# Altium PCB PX4FMUv1.6.PcbDoc (part 2 of 2)
Units mil, origin at the board's own origin, x right, y up, seen from the top; angles counter-clockwise.
Board outline 1968.5 x 1417.32 mil, 4 copper layers (Top, Route2, Route15, Bottom), stack 57.482 mil thick; 118 components, 107 nets, 504 pads, 254 vias.
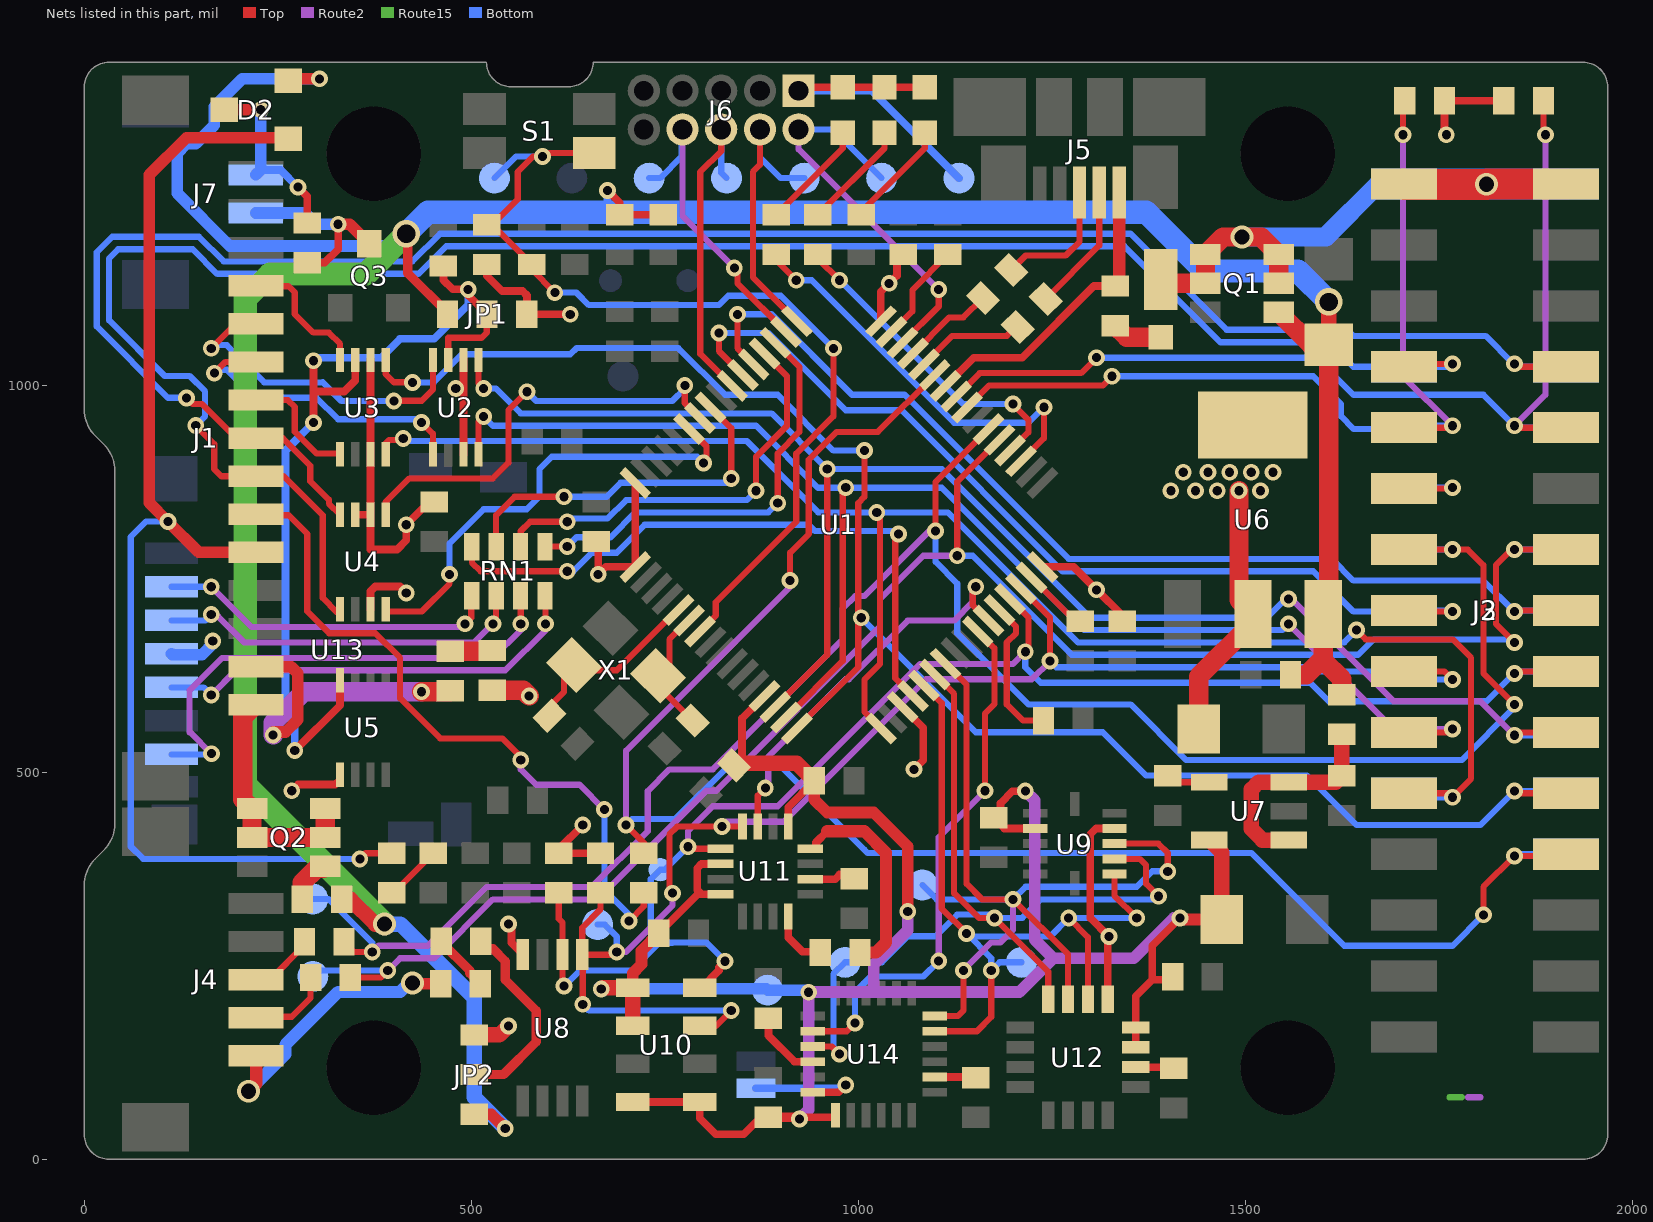
[diagram p4: the nets of this part, all layers, seen from the top]

## Via types
v1: diameter 21.65/21.65/21.65/21.65 (per signal layer), hole 11.81, Top to Bottom, 242 vias
v2: diameter 29.54/29.54/29.54/29.54 (per signal layer), hole 19.69, Top to Bottom, 8 vias
v3: diameter 35.43/35.43/35.43/35.43 (per signal layer), hole 23.62, Top to Bottom, 4 vias

## Nets (pads, with @x,y where several pads share a name; then routed paths per layer and width w, separated by ;. In a path a pad name is that pad's centre, name@x,y a point inside that pad or via, vN(x,y) a via of type N, cw(c..) or ccw(c..) an arc to the next point about the centre after c; other vN are vias at no path point) (continued)
I2C2_SCL: I2C2_SCL.P$1 J2.17 J3.17 R20.1 U1.29 U8.6 U10.8 U11.1 | length 2082.7
  Top w8: R20.1@616,341.09 R20.1@613,344.1 613,310.69 617.8,305.89 U8.6@617.8,264.18 617.8,225.89 v1(620,223.69) ; v1(780,403.69) 782.47,401.21 U11.1@821.93,401.22 ; U1.29@1196.32,723.63 1220,699.95 1220,659.68 v1(1216,655.68) ; v1(1848,627.68) 1850.55,630.24 J3.17@1914.53,630.24
  Top w10: U10.8@795.31,221.51 797.82,221.5 820,243.69 820,247.69 v1(828,255.69)
  Route2 w8: v1(780,403.69) 780,424 812,456 896,456 1080,640 1199.37,640 1199.69,639.68 1216,656 v1(1216,655.68)
  Bottom w8: v1(620,223.69) 640,243.69 707.18,243.69 743.18,279.69 ; 760,279.69 743.18,279.69 ; v1(780,403.69) 750.33,374.02 I2C2_SCL.P$1@744.22,374.02 732,361.8 732,290.87 743.18,279.69 ; v1(828,255.69) 803.68,280 743.5,280 743.18,279.69 ; v1(1216,655.68) 1216,635.68 1236,615.68 1584,615.68 1608,591.68 1812,591.68 v1(1848,627.68) 1850.55,630.24 J2.17@1914.53,630.24
I2C2_SDA: I2C2_SDA.P$1 J2.18 J3.18 R19.1 U1.30 U8.5 U10.7 U11.16 | length 2003.5
  Top w8: v1(644,200) 644,263.56 U8.5@643.39,264.18 ; R19.1@667,344.1 667,322.69 643.39,299.07 U8.5@643.39,264.18 ; v1(688,267.69) 684.49,264.17 U8.5@643.39,264.18 ; v1(760,343.69) 756,347.69 756,419.69 766.07,429.76 v1(824,429.76) U11.16@850.47,429.76 ; U10.7@795.31,172.3 816.29,172.29 v1(836,192) ; U1.30@1210.24,737.56 1248,699.8 v1(1248,643.68) ; J3.18@1705.47,630.24 1757.45,630.24 v1(1768,619.68)
  Route2 w8: v1(688,267.69) 700,267.69 760,327.69 v1(760,343.69) ; v1(824,429.76) 830.24,436 904,436 1088,620 1224.32,620 v1(1248,643.68)
  Bottom w8: v1(644,200) 652,192 v1(836,192) ; I2C2_SDA.P$1@663.39,303.15 672.54,303.15 688,287.69 v1(688,267.69) ; v1(1248,643.68) 1256,635.68 1592,635.68 1597.45,630.24 J2.18@1705.47,630.24 1716.02,619.68 v1(1768,619.68)
I2C3_SCL: J2.9 J3.9 R9.1 U1.41 | length 1351.3
  Top w8: U1.41@1126.72,985.32 1157.08,1015.69 1288,1015.69 v1(1308,1035.69) ; v1(1848,947.69) 1850.49,945.2 J3.9@1914.53,945.2 ; R9.1@1885.59,1367.69 1885.59,1326.09 v1(1888,1323.69)
  Route2 w8: v1(1848,947.69) 1888,987.69 v1(1888,1323.69)
  Bottom w8: v1(1308,1035.69) 1592,1035.69 1640,987.69 1808,987.69 v1(1848,947.69) 1850.49,945.2 J2.9@1914.53,945.2
I2C3_SDA: J2.10 J3.10 R7.1 U1.40 | length 1195.7
  Top w8: U1.40@1140.64,971.4 1168.92,999.69 1316,999.69 v1(1328,1011.69) ; v1(1704,1323.69) 1704,1367.69 R7.1@1706.41,1367.69 ; J3.10@1705.47,945.2 1765.51,945.2 v1(1768,947.69)
  Route2 w8: v1(1704,1323.69) 1704,1011.69 v1(1768,947.69)
  Bottom w8: v1(1328,1011.69) 1588,1011.69 1624,975.69 1624,959.69 1640,943.69 1703.96,943.69 J2.10@1705.47,945.2 1707.96,947.69 v1(1768,947.69)
JTCK-SWCLK: J6.4 JTCK-SWCLK.P$1 U1.49 | length 379.7
  Top w8: J6.4@873,1330.69 873,1284.69 864,1275.69 864,1139.47 U1.49@920.72,1082.76
  Bottom w8: J6.4@873,1330.69 873,1294.69 900.03,1267.65 JTCK-SWCLK.P$1@930.32,1267.65
JTDI: J6.8 JTDI.P$1 U1.50 | length 406.4
  Top w8: v1(840,1151.69) 844,1147.69 844,1131.63 U1.50@906.79,1068.84
  Route2 w8: J6.8@773,1330.69 773,1218.69 v1(840,1151.69)
  Bottom w8: JTDI.P$1@729.92,1267.65 743.97,1267.65 772,1295.69 772,1329.69 J6.8@773,1330.69
JTDO: J6.6 JTDO.P$1 U1.55 | length 425.6
  Top w8: J6.6@823,1330.69 823,1302.69 796,1275.69 796,1040.44 U1.55@837.2,999.24
  Bottom w8: J6.6@823,1330.69 823,1274.57 JTDO.P$1@829.92,1267.65
JTMS-SWDIO: J6.2 JTMS-SWDIO.P$1 U1.46 | length 503.6
  Top w8: U1.46@1057.12,1054.92 1104,1101.8 v1(1104,1123.69)
  Route2 w8: J6.2@923,1330.69 923,1304.69 v1(1104,1123.69)
  Bottom w8: J6.2@923,1330.69 967.28,1330.69 JTMS-SWDIO.P$1@1030.32,1267.65
LED_AMBER: R14.1 U1.35 | length 530.9
  Top w8: R14.1@894,1169.1 894,1161.69 v1(920,1135.69) ; U1.35@1210.24,901.8 1240,931.57 v1(1240,971.69)
  Bottom w8: v1(920,1135.69) 940,1135.69 1124,951.69 1220,951.69 v1(1240,971.69)
LED_BLUE: R15.1 U1.36 | length 413.3
  Top w8: R15.1@948,1169.1 948,1163.69 v1(976,1135.69) ; U1.36@1196.32,915.73 1220,939.41 1220,955.69 v1(1200,975.69)
  Bottom w8: v1(976,1135.69) 1136,975.69 v1(1200,975.69)
MAG_DRDY: U1.27 U11.15 | length 518.5
  Top w8: U11.15@870.16,429.76 870.16,469.84 v1(880,479.69) ; v1(1152,739.68) 1152,735.68 1148,731.68 1148,715.68 1167.89,695.8 U1.27@1168.48,695.79
  Route2 w8: v1(880,479.69) 883.69,483.37 883.69,519.68 984,620 988,620 1064,696 1124,696 1148,720 1148,735.68 v1(1152,739.68)
MPU_CS: U1.26 U14.8 | length 688.4
  Top w8: U14.8@941.26,165.22 985.21,165.21 v1(996,176) ; U1.26@1154.56,681.88 1176,660.44 1176,588 1164,576 v1(1164,476)
  Route2 w8: v1(1104,256) 1104,416 v1(1164,476)
  Bottom w8: v1(996,176) 996,216 1016,236 1084,236 v1(1104,256)
N$1: C4.2 U1.6 X1.1 | length 165.2
  Top w8: U1.6@781.52,695.79 780.11,695.8 756,671.68 756,639.44 X1.1@741.28,624.72 741.28,611.59 C4.2@786.16,566.7
N$2: C3.1 U1.5 X1.3 | length 249
  Top w8: C3.1@600.98,572.85 600.98,584.66 620,603.68 620,625.93 X1.3@632.72,638.64 639.67,631.68 688,631.68 766.04,709.72 U1.5@767.6,709.72
N$3: J1.2 L2.2 | length 422.2
  Top w15: J1.2@221.92,636.41 267.59,636.41 276,628 276,568 260,552 244,552 v1(244,548)
  Top w25: v1(435.69,604) 471.91,604 L2.2@473,605.09
  Route2 w25: v1(244,548) 244,564 284,604 v1(435.69,604)
N$4: D2.3 J7.1 R22.2 | length 242.7
  Top w10: v1(276,1256) 288,1244 R22.2@288,1209.59
  Top w15: D2.3@180.69,1356 v1(228,1356)
  Bottom w10: J7.1@228,1278.21 253.79,1278.21 v1(276,1256)
  Bottom w15: J7.1@221.61,1271.82 228,1278.21 v1(228,1356)
N$5: F2.2 L3.1 | length 75.5
  Top w12: F2.2@461.03,281.29 461.03,280.65 498,243.69 498,240.28 L3.1@511.59,226.69
N$8: J4.2 L5.2 | length 107.4
  Top w8: J4.2@221.92,182.79 223.13,184 268,184 292.41,208.41 L5.2@292.41,234.69
N$9: C16.1 U7.4 | length 57.2
  Top w8: C16.1@1400,495.28 1408.19,487.09 U7.4@1453.81,487.09
N$10: C24.1 U11.8 | length 76.8
  Top w10: U11.8@909.53,313.62 909.53,286.47 928,268 950.09,268 C24.1@951.1,267
N$11: J4.3 L4.2 | length 85.2
  Top w8: J4.3@221.92,232 225.92,236 244,236 280.41,272.41 280.41,276.69 L4.2@284.41,280.69
N$12: J1.11 U2.8 | length 434
  Top w8: v1(164,1047.69) 195.64,1079.32 J1.11@221.92,1079.33 ; v1(400,979.69) 400.32,980 436,980 450.47,994.47 U2.8@450.47,1032.71
  Bottom w8: v1(164,1047.69) 168.32,1052 184,1052 232.32,1003.69 308,1003.69 308,1004 332.32,979.69 v1(400,979.69)
N$13: J1.10 U2.1 | length 405.4
  Top w8: v1(168,1015.69) 182.43,1030.11 J1.10@221.92,1030.12 ; v1(435.75,951.87) 436.13,951.87 450.47,937.53 U2.1@450.47,910.67
  Bottom w8: v1(168,1015.69) 172.32,1020 184,1020 220,984 300,984 328,956 ; 328.13,955.87 328,956 ; v1(435.75,951.87) 431.62,956 328,956
N$14: L1.2 Q2.4 | length 60
  Top w25: L1.2@281.41,335.69 281.41,357.09 300,375.69 308.65,375.69 Q2.4@311.24,378.29
N$15: J1.12 U3.8 | length 181.3
  Top w8: J1.12@221.92,1128.54 222.46,1128 264,1128 272,1120 272,1092 296,1068 316,1068 330.47,1053.53 U3.8@330.47,1032.71 U3.8@330.47,1037.21
N$16: J1.9 U3.1 | length 156.4
  Top w8: J1.9@221.92,980.9 263.1,980.9 272,972 272,940 300,912 329.13,912 U3.1@330.47,910.67 U3.1@330.47,910.67
N$17: C24.2 U11.12 | length 278.3
  Top w10: U11.12@938.07,401.22 945.53,401.21 945.53,409.21 960,423.69
  Top w16: 960,423.69 1008,423.69 1036,395.69 1036,280 1023,267 C24.2@1002.28,267
N$18: F2.1 JP2.2 | length 260.5
  Top w12: JP2.2@504,109.28 541.59,109.28 584,151.69 584,191.69 544,231.69 544,255.69 528,271.69 521.82,271.69 F2.1@512.21,281.29
N$20: J2.12 J3.12 | length 126.1
  Top w8: J3.12@1705.47,866.46 1766.77,866.46 v1(1768,867.69)
  Bottom w8: J2.12@1705.47,866.46 1706.7,867.69 v1(1768,867.69)
N$21: RN1.5 U13.P$2 | length 442.8
  Top w8: v1(492,691.68) 500,699.68 500,723.43 500.76,724.19 RN1.5@500.76,728.18
  Route2 w8: v1(164,739.68) 216,687.68 488,687.68 v1(492,691.68)
  Bottom w8: U13.P$2@112.63,739.53 112.79,739.68 v1(164,739.68)
N$23: D1.ANODE L8.1 | length 65.2
  Top w25: L8.1@1332,1077.1 1347,1062.09 D1.ANODE@1391,1062.1
N$24: J4.1 L3.2 | length 364
  Top w15: v2(424,227.69) 425,226.69 L3.2@460.41,226.69
  Top w16: v2(212,87.69) 221.92,97.61 J4.1@221.92,133.57
  Bottom w16: v2(212,87.69) 260,135.69 260,148 328,216 408,216 419.69,227.69 v2(424,227.69)
N$25: J7.2 Q3.3 R22.1 | length 242.1
  Top w10: R22.1@288,1158.41 310.41,1158.41 328,1176 v1(328,1208)
  Top w15: v1(328,1208) 342.99,1208 Q3.3@368,1183
  Bottom w15: J7.2@221.61,1222.61 285.39,1222.61 300,1208 v1(328,1208)
N$26: RN1.6 U13.P$3 | length 481.6
  Top w8: v1(528,691.68) 532,695.68 532,727.94 RN1.6@532.25,728.18
  Route2 w8: v1(164,703.68) 166.9,700.79 173.23,700.79 206.33,667.68 504,667.68 v1(528,691.68)
  Bottom w8: U13.P$3@112.63,696.23 156.54,696.22 v1(164,703.68)
N$27: F1.2 L2.1 | length 54.6
  Top w25: L2.1@473,656.27 526.28,656.28 F1.2@527.24,657.24
N$28: LED3.C R15.2 | length 141.5
  Top w8: R15.2@948,1220.28 1034,1306.28 LED3.C@1034,1326.16
N$29: LED1.C R13.2 | length 139.8
  Top w8: R13.2@1004,1220.28 1004,1224.28 1086,1306.28 LED1.C@1086,1326.16
N$30: LED2.C R14.2 | length 141.5
  Top w8: R14.2@894,1220.28 980,1306.28 LED2.C@980,1326.16
N$31: RN1.7 U13.P$7 | length 650.8
  Top w8: RN1.7@563.75,728.18 564,727.94 v1(564,691.68)
  Route2 w8: v1(164.32,524) 136.63,551.68 136,551.68 136,605.68 178,647.68 528,647.68 564,683.68 v1(564,691.68)
  Bottom w8: U13.P$7@112.63,523 163.31,522.99 v1(164.32,524)
N$32: RN1.8 U13.P$5 | length 567.1
  Top w8: RN1.8@595.24,728.18 596,727.43 v1(596,691.68)
  Route2 w8: v1(164,599.68) 196,631.68 544,631.68 596,683.68 v1(596,691.68)
  Bottom w8: U13.P$5@112.63,609.61 154.08,609.61 v1(164,599.68)
N$34: C25.1 U12.14 | length 49.9
  Top w10: U12.14@1358.8,118.89 1406.39,118.89 C25.1@1408,117.28
N$35: L10.1 R11.2 | length 75.2
  Top w8: L10.1@397,344.1 399.82,344.09 R11.2@451,395.28
N$36: C23.1 U11.10 | length 61.6
  Top w10: U11.10@938.07,361.85 970.16,361.84 976,367.69 989.59,367.69 C23.1@995,362.28
N$40: C20.1 U14.20 | length 55.4
  Top w10: U14.20@1098.74,106.16 1152.88,106.16 C20.1@1152,105.28
N$41: J1.1 Q2.1 Q2.2 Q2.5 Q2.6 | length 316
  Top w25: J1.1@221.92,587.2 221.12,587.2 204.72,570.8 204.72,465.12 Q2.1@216.76,453.09 Q2.2@216.76,415.69 Q2.5@311.24,415.69 Q2.6@311.24,453.09
N$42: C26.1 U14.10 | length 93.7
  Top w10: C26.1@884,182.1 884,159.69 917.84,125.84 U14.10@941.26,125.85
N$44: JP6.2 U14.12 | length 164.2
  Top w10: U14.12@941.26,86.48 974.79,86.47 v1(984,95.69)
  Bottom w10: JP6.2@868,91.69 980,91.69 v1(984,95.69)
N$100: C14.1 L11.2 U7.1 U7.3 | length 283.3
  Top w10: C14.1@1616.81,487.09 C14.1@1625,495.28
  Top w20: U7.1@1556.19,412.29 1522.4,412.28 1508,426.69 1508,477.69 1517.4,487.09 U7.3@1556.19,487.09 C14.1@1616.81,487.09 ; C14.1@1625,495.28 L11.2@1625,549.09
OTG_DM: J5.D- R6.1 | length 166.4
  Top w8: R6.1@1242.35,1111.41 1311.59,1180.65 J5.D-@1311.59,1249.13
OTG_DP: J5.D+ R8.1 | length 167.1
  Top w8: R8.1@1197.62,1148.82 1216.48,1167.69 1268,1167.69 1286,1185.69 J5.D+@1286,1249.13
OTG_FS_DM: R6.2 U1.44 | length 141.1
  Top w8: U1.44@1084.96,1027.08 1121.56,1063.69 1192,1063.69 1203.53,1075.22 R6.2@1206.17,1075.23
OTG_FS_DP: R8.2 U1.45 | length 120.1
  Top w8: U1.45@1071.05,1041 1117.73,1087.69 1136,1087.69 1160.95,1112.63 R8.2@1161.44,1112.64
PB2-BOOT1: R5.1 U1.28 | length 192.1
  Top w8: U1.28@1182.4,709.72 1204,688.12 1204,679.68 1192,667.68 1192,587.68 1213,566.68 R5.1@1239.41,566.68
POLY1:  | length 16
  Route15 w8: 1764,80 1780,80
POLY2:  | length 16
  Route2 w8: 1788,80 1804,80
PPM_INPUT: J2.23 J3.23 R10.1 U1.43 | length 2305.3
  Top w8: v1(700,431.69) 724,407.69 724,396.28 R10.1@723,395.28 ; v1(912,747.68) 912,783.68 936,807.68 936,903.69 972,939.69 1025.41,939.69 U1.43@1098.89,1013.16 ; v1(1808,315.69) 1808,351.69 v1(1848,391.69) 1912.2,391.69 J3.23@1914.53,394.02
  Route2 w8: v1(700,431.69) 700,527.68 912,739.68 v1(912,747.68)
  Bottom w8: v1(700,431.69) 708,439.69 763.68,439.69 832,508 900,508 1008,400 1007.69,400 1012,395.69 1508,395.69 1628,275.69 1768,275.69 v1(1808,315.69) ; v1(1848,391.69) 1850.33,394.02 J2.23@1914.53,394.02
PPM_INPUT_CON: J1.6 R10.2 | length 908.1
  Top w8: J1.6@221.92,833.26 223.18,832 264,832 288,808 288,708 316.32,679.68 376,679.68 408,647.68 408,595.68 460,543.68 540,543.68 564,519.68 v1(564,515.68) ; v1(704,307.69) 723,326.69 R10.2@723,344.1
  Route2 w8: v1(564,515.68) 564,503.69 584,483.69 640,483.69 v1(672,451.69)
  Bottom w8: v1(672,451.69) 672,351.69 672,348 704,316 v1(704,307.69)
RESET: !RESET.P$1 C17.2 R16.1 S1.A1 U1.7 | length 1230.6
  Top w8: R16.1@520,1207.28 R16.1@526.82,1207.28 ; v1(608,1119.69) 578,1149.69 C17.2@578,1156.1 R16.1@526.82,1207.28 ; S1.A1@658.41,1299.69 658.87,1300.14 596.46,1300.14 v1(592,1295.69) 580,1295.69 560,1275.69 560,1240.46 R16.1@526.82,1207.28 ; U1.7@795.44,681.88 816,702.44 816,719.68 920,823.68 920,911.69 968,959.69 v1(968,1047.69)
  Bottom w8: !RESET.P$1@529.92,1267.65 557.95,1295.69 v1(592,1295.69) ; v1(608,1119.69) 636,1119.69 652,1103.69 820,1103.69 832,1115.69 900,1115.69 v1(968,1047.69)
SPI1_MISO: SPI1_MISO.P$1 U1.22 U9.8 U12.4 U14.9 | length 1194.5
  Top w8: U14.9@941.26,145.53 966.16,145.53 v1(976,135.69) ; U1.22@1098.89,626.2 1124,601.09 1124,343.69 1156,311.69 v1(1176,311.69) 1245.61,242.07 U12.4@1245.61,206.49 ; U9.8@1331.18,388 1363.69,388 1372,379.69 1372,355.69 v1(1388,339.69)
  Bottom w8: v1(976,135.69) 976,136 968,144 968,239.34 SPI1_MISO.P$1@982.99,254.33 1030.65,254.33 1030.65,254.65 1064,288 1100,288 1128,316 1168,316 1172,312 1175.69,312 v1(1176,311.69) ; v1@1176,312 v1(1176,311.69) ; v1(1388,339.69) 1384,335.69 1236,335.69 1212,311.69 v1(1176,311.69)
SPI1_MOSI: SPI1_MOSI.P$1 U1.23 U9.9 U12.3 U14.24 | length 1177.8
  Top w8: U14.24@1098.74,184.9 1128.9,184.9 1136,192 v1(1136,243.69) ; U1.23@1112.8,640.12 1140,612.92 1140,355.69 1160,335.69 v1(1200,335.69) 1271.2,264.48 U12.3@1271.2,206.49 ; U9.9@1331.18,407.69 1388,407.69 1400,395.69 v1(1400,371.69)
  Route2 w8: v1(1136,243.69) 1136,244 1172,280 1184,280 1200,296 v1(1200,335.69)
  Bottom w8: SPI1_MOSI.P$1@1082.99,354.33 1101.64,335.69 v1(1200,335.69) 1216.32,352 1360,352 1380,372 1399.69,372 v1(1400,371.69)
SPI1_SCK: SPI1_SCK.P$1 U1.21 U9.7 U12.2 U14.23 | length 1004.9
  Top w8: U1.21@1084.96,612.28 1108,589.24 1108,323.69 v1(1140,291.69) ; U14.23@1098.74,165.22 1153.53,165.21 1172,183.69 v1(1172,243.69) ; v1(1272,311.69) 1296.8,286.89 U12.2@1296.8,206.49 ; U9.7@1331.18,368.32 1331.18,340.5 v1(1360,311.69)
  Bottom w8: v1@1140.32,291.69 v1(1140,291.69) ; SPI1_SCK.P$1@1210.99,254.33 1182.65,254.33 v1(1172,243.69) 1172,259.69 v1(1140,291.69) ; v1(1360,311.69) v1(1272,311.69) 1248,287.69 1144,287.69 v1(1140,291.69)
SPI3_MISO: RN1.2 U1.52 | length 556.3
  Top w8: RN1.2@563.75,791.18 563.75,791.43 RN1.2@564,791.68 ; RN1.2@564,787.43 RN1.2@564,791.68 ; v1(624,823.68) 576,823.68 564,811.68 RN1.2@564,791.68 ; v1(868,863.69) 868,907.69 908,947.69 908,1011.95 U1.52@878.95,1041
  Bottom w8: v1(624,823.68) 628,827.68 676,827.68 700,851.69 856,851.69 v1(868,863.69)
SPI3_MOSI: RN1.3 U1.57 | length 467.4
  Top w8: RN1.3@532.25,791.18 532,791.43 532,832 556,856 v1(620,856) ; U1.57@809.36,971.4 836,944.76 v1(836,879.69)
  Bottom w8: v1(620,856) 674.9,856 692.91,874.02 830.33,874.02 v1(836,879.69)
SPI3_NSS: RN1.4 U1.20 | length 826.5
  Top w8: RN1.4@500.76,791.18 500.76,770.93 512,759.68 v1(624,759.68) ; v1(1052,807.68) 1052,803.68 1048,799.68 1048,621.41 U1.20@1071.05,598.36
  Bottom w8: v1(624,759.68) 632,759.68 656,783.68 688,783.68 724,819.68 936,819.68 944,811.68 1048,811.68 v1(1052,807.68)
SPI3_SCK: RN1.1 U1.51 | length 555.9
  Top w8: RN1.1@595.24,791.18 595.75,791.68 v1(624,791.68) ; U1.51@892.88,1054.92 892.87,1054.81 924,1023.69 924,939.69 896,911.69 v1(896,847.69)
  Bottom w8: v1(624,791.68) 636,803.68 680,803.68 712,835.68 884,835.68 v1(896,847.69)
UART5_RX: J2.16 J3.16 U1.54 | length 1228.7
  Top w8: v1(820,1067.69) 820,1044.28 U1.54@851.11,1013.16 ; J3.16@1705.47,708.98 1706.76,707.68 v1(1768,707.68)
  Bottom w8: v1(820,1067.69) 884,1067.69 984,967.69 1056,967.69 1264,759.68 1588,759.68 1640,707.68 1704.18,707.68 J2.16@1705.47,708.98 1766.71,708.98 v1(1768,707.68)
UART5_TX: J2.15 J3.15 U1.53 | length 1370.5
  Top w8: v1(844,1091.69) 844,1048.12 U1.53@865.04,1027.08 ; v1(1848,707.68) 1849.29,708.98 J3.15@1914.53,708.98
  Bottom w8: v1(844,1091.69) 888,1091.69 992,987.69 1060,987.69 1272,775.68 1612,775.68 1640,747.68 1808,747.68 v1(1848,707.68) 1849.29,708.98 J2.15@1914.53,708.98
USART1_RX: U1.59 U4.4 | length 604.1
  Top w8: U4.4@389.53,710.66 392.5,707.68 436,707.68 472,743.68 v1(472,755.68) ; U1.59@781.52,943.57 804,921.09 804,903.69 v1(800,899.69)
  Bottom w8: v1(472,755.68) 472,795.68 516,839.69 571.68,839.69 588,856 588,891.69 604,907.69 792,907.69 v1(800,899.69)
USART1_RX_EXT: J1.7 J2.8 J3.8 U4.1 | length 2559.9
  Top w8: v1(144,948) 168,924 168,891.69 177.21,882.47 J1.7@221.92,882.48 257.53,882.47 308,832 308,725.13 326.47,706.66 U4.1@330.47,710.66 ; J3.8@1705.47,1023.94 1709.22,1027.69 v1(1768,1027.69)
  Bottom w8: v1(144,948) 156,960 156,992 136,1012 104,1012 32,1084 32,1164 43.69,1175.69 140,1175.69 172,1143.69 172.32,1144 432,1144 467.69,1179.69 1344,1179.69 1468,1055.69 1608,1055.69 1639.75,1023.94 J2.8@1705.47,1023.94 1764.25,1023.94 v1(1768,1027.69)
USART1_TX: U1.58 U4.5 | length 567.7
  Top w8: U4.5@389.53,832.7 389.53,849.21 420,879.69 528,879.69 548,899.69 548,967.69 v1(572,991.69) ; v1(776,999.69) 776,976.92 U1.58@795.44,957.48
  Bottom w8: v1(572,991.69) 584,979.69 760,979.69 776,995.69 v1(776,999.69)
USART1_TX_EXT: J1.8 J2.7 J3.7 U4.8 | length 2600.2
  Top w8: v1(132,983.69) 139.69,976 152,976 196.32,931.69 J1.8@221.92,931.69 256.32,931.69 292,896 292,876 316,852 316,847.18 U4.8@330.47,832.7 ; v1(1848,1027.69) 1851.75,1023.94 J3.7@1914.53,1023.94
  Bottom w8: v1@132.32,983.69 v1(132,983.69) 131.69,984 108,984 16,1076 16,1172 36,1192 148,1192 180,1160 424,1160 459.69,1195.69 1352,1195.69 1476,1071.69 1632,1071.69 1640,1063.69 1810.78,1063.69 1846.78,1027.69 v1(1848,1027.69) 1851.75,1023.94 J2.7@1914.53,1023.94
USART2_CTS: J2.19 J3.19 U1.14 U2.5 | length 2048.4
  Top w8: U2.5@509.53,1032.71 509.53,1002.16 v1(516,995.69) ; U1.14@892.88,584.44 960,651.57 v1(960,891.69) ; v1(1848,547.68) 1851.81,551.5 J3.19@1914.53,551.5
  Route2 w8: v1(1556,723.68) 1560,723.68 1692,591.68 1804,591.68 v1(1848,547.68)
  Bottom w8: v1(516,995.69) 532,995.69 564,963.69 888,963.69 v1(960,891.69) 1108,891.69 1300,699.68 1528,699.68 1552,723.68 v1(1556,723.68) ; v1(1848,547.68) 1910.72,547.68 J2.19@1914.53,551.5
USART2_RTS: J2.20 J3.20 U1.15 U2.4 | length 1935.8
  Top w8: U2.4@509.53,910.67 509.53,953.21 v1(516,959.69) ; U1.15@906.79,570.52 980,643.73 980,863.69 v1(984,867.69) ; J3.20@1705.47,551.5 1764.19,551.5 1764.19,551.87 v1(1768,555.68)
  Route2 w8: v1(1556,691.68) 1692,555.68 v1(1768,555.68)
  Bottom w8: v1(516,959.69) 528,947.69 868,947.69 948,867.69 v1(984,867.69) 1108,867.69 1292,683.68 1548,683.68 v1(1556,691.68) ; J2.20@1705.47,551.5 1709.28,555.31 1709.28,555.68 v1(1768,555.68)
USART2_RX: J2.22 J3.22 U1.17 U3.4 | length 2167.2
  Top w8: U3.4@389.53,910.67 389.53,924.96 393.7,929.13 409.95,929.13 v1(412.13,931.31) ; v1(1024,835.68) 1028,831.68 1028,639.68 1008,619.68 1008,577.89 U1.17@1029.28,556.6 ; v1(1644,683.68) 1656,671.68 1768,671.68 1792,647.68 1792,491.69 v1(1768,467.69) 1762.93,472.76 J3.22@1705.47,472.76
  Bottom w8: v1(412.13,931.31) 415.43,928 856,928 948.32,835.68 v1(1024,835.68) 1116,835.68 1284,667.68 1628,667.68 v1(1644,683.68) ; J2.22@1705.47,472.76 1710.54,467.69 v1(1768,467.69)
USART2_TX: J2.21 J3.21 U1.16 U3.5 | length 2222.3
  Top w8: U3.5@389.53,1032.71 389.53,1014.47 400,1004 423.69,1004 v1(424,1003.69) ; U1.16@920.72,556.6 1000,635.89 v1@1000,699.68 ; v1(1004,699.68) v1@1000,699.68 ; v1(1008,915.69) 1008,855.69 1000,847.69 v1@1000,699.68 ; v1(1848,475.69) 1850.93,472.76 J3.21@1914.53,472.76
  Bottom w8: v1(424,1003.69) 451.69,1003.69 488,1040 628,1040 636,1048 767.68,1048 828,987.69 896,987.69 968,915.69 v1(1008,915.69) ; v1(1004,699.68) 1152,551.68 1316,551.68 1372,495.69 1580,495.69 1644,431.69 1804,431.69 v1(1848,475.69) 1911.6,475.69 J2.21@1914.53,472.76
USART6_RX: J2.14 J3.14 L4.1 U1.38 USART6_RX.P$1 | length 2718.2
  Top w8: L4.1@335.59,280.69 347.59,268.69 347.59,267.69 v1(372,267.69) ; v1(1100,811.68) 1100,875.09 U1.38@1168.48,943.57 ; v1(1768,787.68) J3.14@1705.47,787.72 J3.14@1705.47,787.72 1787.97,787.72 1808,767.68 1808,627.68 v1(1848,587.68)
  Route2 w8: v1(372,267.69) 380,275.69 444,275.69 520,351.69 656,351.69 728,423.69 728,475.69 756,503.69 812,503.69 980,671.68 980,711.68 996,727.68 1008,727.68 1092,811.68 v1(1100,811.68)
  Bottom w8: USART6_RX.P$1@295.28,336.22 315.46,336.22 372,279.69 v1(372,267.69) ; v1(1100,811.68) 1100,771.68 1128,743.68 1128,679.68 1220,587.68 1352,587.68 1424,515.68 1780,515.68 1848,583.68 v1(1848,587.68) ; J2.14@1705.47,787.72 v1(1768,787.68) v1(1768,787.68)
USART6_TX: J2.13 J3.13 L5.1 U1.37 USART6_TX.P$1 | length 2363
  Top w8: L5.1@343.59,234.69 383,234.69 v1(392,243.69) ; v1(1128,779.68) 1128,875.25 U1.37@1182.4,929.64 U1.37@1181.96,929.65 ; v1(1848,667.68) 1824,691.68 1824,767.68 1844.03,787.72 v1(1848.03,787.72) J3.13@1914.53,787.72
  Route2 w8: v1(392,243.69) 408,259.69 452,259.69 528,335.69 663.68,335.69 804,476 816.32,476 1028,687.68 1028,723.68 1084,779.68 v1(1128,779.68)
  Bottom w8: USART6_TX.P$1@295.81,235.69 USART6_TX.P$1@295.28,236.22 302.74,243.69 v1(392,243.69) ; v1(1128,779.68) 1148,779.68 1276,651.68 1646,651.68 1666,671.68 1844,671.68 v1(1848,667.68) ; v1(1848.03,787.72) J2.13@1914.53,787.72
VBAT_IN: D2.1 J1.5 L10.2 | length 1594
  Top w8: v1(356,388) 363.28,395.28 L10.2@397,395.28
  Top w15: J1.5@221.92,784.05 147.95,784.05 v1(108,824) 84,848 84,1272 132,1320 264.77,1320 D2.1@263.37,1318.6
  Bottom w8: v1(108,824) 80,824 60,804 60,404 76,388 v1(356,388)
VBUS: J5.VBUS L8.2 U1.42 | length 395.6
  Top w10: U1.42@1112.8,999.24 1149.24,1035.69 1212,1035.69 1304.59,1128.28 L8.2@1332,1128.28 L8.2@1337.18,1133.46
  Top w16: L8.2@1337.18,1133.46 J5.VBUS@1337.18,1249.13
VCAP_1: C11.1 U1.31 | length 88.3
  Top w8: U1.31@1224.16,751.47 C11.1@1283,692.63
  Top w10: C11.1@1283,692.63 1284.36,692.63 C11.1@1287,695.27
VCAP_2: C12.1 U1.47 | length 130.4
  Top w8: U1.47@1043.21,1068.84 1043.2,1068.89 1070,1095.69 1070,1123.09 C12.1@1116,1169.1
VDD_3V3: C2.1 C6.A C8.1 C9.1 C10.1 F1.1 J6.1 JP1.1 JP2.3 LED1.A LED2.A LED3.A R7.2 R9.2 R16.2 R19.2 R20.2 U1.1 U1.19 U1.32 U1.48 U1.64 U2.3 U2.6 U3.3 U3.6 U4.3 U4.6 U4.7 U5.1 U6.2 U6.4 U8.8 U9.10 U12.1 U13.P$4 VDD_3V3.P$1 | length 2824.3
  Top w10: v1(268,476) 276,484 324,484 330.47,490.47 U5.1@330.47,496.66 ; U4.7@350.16,832.7 U4.6@369.84,832.7 ; U4.3@369.84,710.66 369.84,733.84 376,740 408,740 416,732 v1(416,731.68) ; U3.6@369.84,1032.71 U3.3@369.84,910.67 U4.6@369.84,832.7 ; C2.1@452,849.27 445.59,849.28 v1(416,819.68) 416,799.68 404,787.68 369.84,787.68 U4.6@369.84,832.7 ; v1(480,995.69) v1@489.84,995.69 ; U2.3@489.84,910.67 v1@489.84,995.69 ; U2.6@489.84,1032.71 v1@489.84,995.69 ; R16.2@520,1156.1 520,1141.69 540,1121.69 566.32,1121.69 572,1116 572,1092.09 JP1.1@571.59,1091.69 v1(628,1091.69) ; v1(548,303.69) 552,299.69 552,279.69 567.51,264.17 U8.8@566.61,264.18 ; v1(644,431.69) 613,400.69 R20.2@613,395.28 R19.2@667,395.28 ; C10.1@661.39,798.09 664,795.48 v1(664,755.68) 673.71,765.4 U1.1@711.92,765.4 U1.64@711.92,873.96 ; J6.1@923,1380.69 927.53,1385.21 LED2.A@980,1385.22 LED3.A@1034,1385.22 LED1.A@1086,1385.22 ; U1.48@1029.28,1082.76 1029.28,1120.97 v1(1040,1131.69) 1050,1141.69 1050,1157.69 1058,1165.69 C9.1@1058,1169.1 ; U1.19@1057.12,584.44 1084,557.57 1084,515.68 v1(1072,503.69) ; U1.32@1238.08,765.4 1278.29,765.4 v1(1308,735.68) 1341,702.68 C8.1@1341,695.27 ; U12.1@1322.39,206.49 v1@1322.39,289.3 ; v1@1322.39,290.07 v1@1322.39,289.3 ; U9.10@1331.18,427.38 1307.69,427.37 1300,419.69 1300,311.69 v1(1324,287.69) v1@1322.39,289.3 ; U6.2@1508,691.68 1508,702.68 U6.2@1510,704.68 ; U6.4@1508,950.69 U6.4@1510,948.69 ; v1(1760,1323.69) 1757.59,1326.09 R7.2@1757.59,1367.69 R9.2@1834.41,1367.69
  Top w20: JP2.3@504,160.46 536.46,160.46 v1(548,172)
  Top w25: F1.1@527.24,606.06 567.17,606.06 v1(574.8,598.43) ; C6.A@1439.88,555.68 1439.88,623.57 U6.2@1508,691.68 ; v1(1492,863.69) 1492,722.68 U6.2@1510,704.68
  Bottom w10: J6.1@923,1380.69 1017.28,1380.69 VDD_3V3.P$1@1130.32,1267.65
  Bottom w15: U13.P$4@112.63,652.92 113.54,652 152,652 166,666 v1(166,669.68)
  other v1: 1404,863.69 1436,863.69 1464,863.69 1520,863.69 1420,887.69 1452,887.69 1480,887.69 1508,887.69 1536,887.69
VDD_3V3_ANALOG: C13.A C15.1 C18.1 C19.1 C21.1 C22.1 C28.1 U1.13 U7.5 U9.2 U10.1 U10.2 U10.4 U10.5 U11.2 U11.4 U11.13 U12.15 U12.16 U14.13 VDDA_3V3.P$1 | length 3056.7
  Top w10: U10.4@708.69,73.87 U10.5@795.31,73.87 795.31,52.69 816,32 852,32 874.09,54.09 C28.1@884,54.1 U14.13@968,54.09 ; C19.1@742.41,291.69 792.88,342.16 797.84,342.16 ; 792,347.69 792,348 ; U11.4@821.93,342.16 797.84,342.16 ; U11.2@821.93,381.53 797.53,381.53 792,376 792,348 ; C15.1@844.83,511.69 842.25,509.1 C15.1@839.41,509.1 850,519.68 850,569.68 878.68,598.37 U1.13@878.95,598.36 ; U11.13@909.53,429.76 909.53,454.8 C22.1@943.41,488.69 ; U14.13@969.64,54.09 U14.13@968,54.09 ; U14.13@970.79,56.94 970.79,56.88 U14.13@968,54.09 ; v1(1216,475.69) 1216,475.28 1199.28,475.28 1184,460 1184,450.28 C18.1@1175,441.28 1188.91,427.37 U9.2@1228.82,427.38 ; U12.15@1358.8,144.49 U12.16@1358.8,170.08 1358.8,210.49 1380,231.69 ; C21.1@1406.41,235.69 1402.41,231.69 1380,231.69 ; v1(1416,311.69) 1380,275.69 1380,231.69 ; 792,348 797.84,342.16
  Top w12: C28.1@884,54.1 924,54.09 v1(924,52)
  Top w15: U10.1@708.69,221.51 708.69,240.38 720,251.69 720,269.28 C19.1@742.41,291.69 ; C22.1@943.41,488.69 943.41,464.59 960,448 1020,448 1064,404 v1(1064,320) ; v1(1416,311.69) 1418,309.69 C13.A@1469.88,309.69
  Top w20: v1(668,219.69) 669.82,221.5 U10.1@708.69,221.51 U10.2@708.69,172.3 ; C15.1@844.83,511.69 920.41,511.69 C22.1@943.41,488.69 ; U7.5@1453.81,412.29 1469.88,396.22 C13.A@1469.88,309.69
  Route2 w15: v1(924,52) 936,64 v1(936,215.69) 936.32,216 1020,216 ; v1(1064,320) 1064,296 1020,252 1020,216 ; v1(1216,475.69) 1228,463.69 1228,283.69 1252,259.69 ; v1(1416,311.69) 1408,311.69 1356,259.69 1252,259.69 ; 1020,216 1207.69,216 1208,215.69 1252,259.69
  Bottom w12: v1(924,52) v1@924,56
  Bottom w15: v1@668,220 881.32,220 VDDA_3V3.P$1@882.99,218.33 933.35,218.33 v1(936,215.69)
  Bottom w20: v1(668,219.69) v1@668,220
VDD_5V: C7.1 C27.A D2.2 JP1.3 JP2.1 L1.1 L11.1 Q1.4 R1.2 R2.2 U6.3 | length 4397.9
  Top w10: v1(676,1251.69) 692,1235.69 R2.2@692,1220.28 R1.2@748,1220.28 ; 1601,644.28 1601,647.68
  Top w12: v3(416,1195.69) 418,1193.69 418,1144.91 469.23,1093.69 JP1.3@469.23,1091.69
  Top w15: D2.2@263.37,1393.4 265.97,1396 v1(304,1396) ; JP2.1@504,58.1 525.59,58.09 v1(544,39.69)
  Top w20: L1.1@332.59,335.69 344,335.69 376,303.69 v2(388,303.69) ; C27.A@1608,1067.69 v3(1608,1107.69)
  Top w25: Q1.4@1543.24,1094.29 1584.96,1052.57 C27.A@1608,1052.57 ; C7.1@1558.59,625.68 1579,625.68 1601,647.68 U6.3@1601,704.68 1608,711.68 C27.A@1608,1052.57 ; 1601,644.28 1625,620.28 L11.1@1625,600.27 ; C27.A@1608,1067.69 C27.A@1608,1052.57
  Route15 w30: v2(388,303.69) 208,483.69 208,1111.69 240,1143.69 364,1143.69 v3(416,1195.69)
  Bottom w10: 676,1223.69 v1(676,1251.69)
  Bottom w15: v1(304,1396) 204,1396 168,1360 168,1336 144,1312 132,1312 120,1300 120,1248 188,1180 400.32,1180 v3(416,1195.69)
  Bottom w20: v2(388,303.69) 408.32,303.69 504,208 504,79.69 v1(544,39.69)
  Bottom w30: v3(416,1195.69) 444,1223.69 676,1223.69 1372,1223.69 1448,1147.69 1568,1147.69 v3(1608,1107.69)
VDD_5V_IN: D1.CATHODE J2.1 J2.2 J3.1 J3.2 Q1.1 Q1.2 Q1.5 Q1.6 | length 1044.3
  Top w25: D1.CATHODE@1391,1136.9 1396.21,1131.69 Q1.2@1448.76,1131.69 Q1.1@1448.76,1169.09 1471.35,1191.69 v2(1496,1191.69) 1520.65,1191.69 Q1.6@1543.24,1169.09 Q1.5@1543.24,1131.69
  Top w40: J3.2@1705.47,1260.16 1705.94,1259.69 v2(1812,1259.69) 1812.47,1260.16 J3.1@1914.53,1260.16
  Bottom w25: v2(1496,1191.69) 1604,1191.69 J2.2@1672,1259.69 ; J2.2@1705.47,1260.16 1672.47,1260.16 J2.2@1672,1259.69 ; v2(1812,1259.69) J2.2@1672,1259.69
  Bottom w40: J2.2@1705.47,1260.16 J2.1@1914.53,1260.16
VDD_IO: C1.1 JP1.2 U2.7 U3.7 U5.8 | length 1177.3
  Top w8: U2.7@470.16,1032.71 470.16,1061.43 513.43,1061.43 520,1068 520,1091.28 JP1.2@520.41,1091.69
  Top w10: v1(272,528) 330.47,586.47 U5.8@330.47,618.7 ; v1(296,951.69) 296,992 ; v1(296,1031.69) 296,992 ; U3.7@350.16,1032.71 350.16,1005.84 349.84,1005.84 336,992 296,992 ; C1.1@464,1154.1 464,1136 476,1124 495.69,1124 v1(496,1123.69) 496,1116.09 JP1.2@520.41,1091.69
  Bottom w10: v1(272,528) 272,584 260,596 260,915.69 v1(296,951.69) ; v1(296,1031.69) 300,1035.69 383.69,1035.69 408,1060 452,1060 496,1104 v1(496,1123.69)
pads on no net: J1.S1 J1.S2 J4.4 J4.S1 J4.S2 J5.GND5 J5.GND6 J5.ID J6.7 J7.S1 J7.S2 S1.A2 S1.B4 U8.7 U9.1 U9.4 U9.6 U9.11 U9.12 U10.6 U11.3 U11.5 U11.6 U11.7 U11.14 U12.6 U12.7 U13.P$1 U13.P$8 U13.P$9 U13.P$10 U13.P$11 U13.P$12 U13.P$13 U13.P$14 U14.2 U14.3 U14.4 U14.5 U14.6 U14.7 U14.14 U14.15 U14.16 U14.17 U14.19 U14.21 U14.22

## Polygon pours and split planes (outlines as drawn)
POLY2 on Route15 "Polygon_1_Net_POLY2" (solid, remove dead copper, pour order 1): 803,449 957,449 957,321.93 930.07,295 803,295
GND on Route15 "Polygon_1_Net_GND" (solid, remove dead copper, pour order 5): -21,1440.37 -21,-17 2001,-17 2001,1440.37
POLY1 on Route2 "Polygon_1_Net_POLY1" (solid, remove dead copper, pour order 4): 803,449 957,449 957,321.93 930.07,295 803,295
VDD_3V3 on Route2 "Polygon_1_Net_VDD_3V3" (solid, remove dead copper, pour order 6): -21,1440.37 -21,-17 2001,-17 2001,1440.37
VDD_3V3 on Top "Polygon_2_Net_VDD_3V3" (solid, remove dead copper, pour order 3): 1581,1064.69 1271,1064.69 1271,797.61 1305.93,762.68 1581,762.68
VDD_3V3 on Bottom "Polygon_3_Net_VDD_3V3" (solid, remove dead copper, pour order 2): 1280,807.68 1280,1011.69 1620,1011.69 1620,807.68
no net on bPlace "Polygon_1_NoNet" (solid, pour order 0): 1338.1,1401.95 1338.1,1305.79 1350.45,1305.79 1392.35,1347.69

## Keep-outs
Keep-Out Layer:
  the board outline again, w0

## Silkscreen, mask and mechanical layers (free items; w line width, h text height)
Dimension:
  the board outline again, w0
tDocu:
  text "5.0V" at 632,1179.69 h20.4 r90
  text "5.0V" at 552,939.69 h20.4 r90
  text "3.3V" at 632,935.69 h20.4 r90
  text "3.3V" at 564,695.68 h20.4 r90
tPlace:
  circle w12: c1144,511.69 r3.94
  circle w12: c1144,511.69 r25.59
  lines w11.81: 1144,540.32 1144,608.32
  lines w12: 1172,511.69 1256,511.69 ; 1256,511.69 1236,491.69 1236,531.68 1256,511.69 ; 1124,600.32 1164,600.32 1144,620.32 1124,600.32
  text "15" at 196.32,1300 h27.2
  text "JTAG" at 764,1247.69 h27.2
  text "ON" at 1128,1248 h23.43 r90
  text "ERR" at 1016,1236 h23.43 r90
  text "ACT" at 1072,1236 h23.43 r90
  text "RESET" at 557.92,1230.96 h16.74
  text "JP1" at 524,1027.69 h20.4
  text "(c) 2012 mjs" at 1356,743.68 h20.4 r90
  text "MULTI" at 303.19,649.85 h27.2 r90
  text "Y" at 1176,579.68 h42.5
  text "1" at 219.26,528.81 h27.2
  text "X" at 1260,487.69 h42.5
  text "Z" at 1104,419.69 h42.5
  text "EXPANSION" at 1684,35.69 h27.2
  text "GPS" at 219.49,32.5 h27.2
  text "JP2" at 565.62,27.3 h20.4
bPlace:
  text "BUZZER" at 276.32,1376 h20.4
  text "VBAT" at 256.32,1326 h16.74
  text "FRONT" at 1308,1319.69 h50.2
  text "(+)" at 256.32,1298 h16.74
  text "+5V" at 1779.53,1287.4 h16.74
  text "+5V" at 1893.7,1287.4 h16.74
  text "GND" at 1716.54,1208.66 h16.74
  text "GND" at 1956.69,1208.66 h16.74
  text "(-)" at 256.32,1178 h16.74
  text "GND" at 256.32,1146 h16.74
  text "CAN2RX" at 1767.72,1129.92 h16.74
  text "CAN2TX" at 1956.69,1129.92 h16.74
  text "UART1_RX" at 1803.15,1051.18 h16.74
  text "UART1_TX" at 1956.69,1051.18 h16.74
  text "I2C3_SDA" at 1799.21,972.44 h16.74
  text "I2C3_SCL" at 1956.69,972.44 h16.74
  text "-NC-" at 1732.28,893.7 h16.74
  text "ADC10" at 1956.69,893.7 h16.74
  text "UART6_RX" at 1803.15,814.96 h16.74
  text "UART6_TX" at 1956.69,814.96 h16.74
  text "UART5_RX" at 1803.15,736.22 h16.74
  text "UART5_TX" at 1956.69,736.22 h16.74
  text "I2C2_SDA" at 1799.21,657.48 h16.74
  text "I2C2_SCL" at 1956.69,657.48 h16.74
  text "UART2RTS" at 1803.15,578.74 h16.74
  text "UART2CTS" at 1956.69,578.74 h16.74
  text "UART2_RX" at 1803.15,500 h16.74
  text "UART2_TX" at 1956.69,500 h16.74
  text "PX4FMU v1.6" at 1424,495.69 h66.93
  text "GPIO1" at 1744.09,421.26 h16.74
  text "PPM_IN" at 1956.69,421.26 h16.74
  text "LIFT LIGHT AND PULL" at 552,372 h23.8
  text "ALARM" at 1751.97,342.52 h16.74
  text "GPIO2" at 1956.69,342.52 h16.74
  text "ADC11" at 1751.97,263.78 h16.74
  text "GND" at 1956.69,263.78 h16.74
  text "ADC13" at 1751.97,185.04 h16.74
  text "ADC12" at 1956.69,185.04 h16.74
dxf:
  lines w0.06: 0,31.5 ccw(c31.5,31.5) 31.5,0 1937.01,0 ccw(c1937.01,31.5) 1968.5,31.5 1968.5,1385.83 ccw(c1937.01,1385.83) 1937.01,1417.32 657.48,1417.32 cw(c625.99,1417.33) 625.98,1385.83 551.18,1385.83 cw(c551.17,1417.33) 519.68,1417.32 31.5,1417.32 ccw(c31.5,1385.83) 0,1385.83 0,31.5

## Text inside footprints (layer, text, board x,y; h text height)
J1: tDocu "1" at 253.42,581.3 h16.74 r90
J2: tPlace "1" at 1932.05,1334.96 h20.08 r270
J3: tPlace "1" at 1955.67,1342.84 h20.08 r90
J4: tDocu "1" at 253.42,125.7 h16.74 r90
J7: tDocu "1" at 253.11,1276.74 h16.74 r90
U9: tPlace "Z" at 1287.87,399.82 h10.04 r270; tPlace "Y" at 1252.44,399.82 h10.04 r270; tPlace "X" at 1291.81,439.19 h10.04 r270
U11: tPlace "Z" at 862.28,379.56 h10.04; tPlace "Y" at 905.59,379.56 h10.04; tPlace "X" at 862.28,342.16 h10.04
U12: tDocu "Z" at 1256.44,159.25 h16.74 r270; tDocu "Y" at 1335.18,155.31 h16.74 r270; tDocu "X" at 1256.44,80.51 h16.74 r270
U13: tDocu "microSD card" at -40.91,526.93 h20.4 r270
U14: tPlace "Z" at 976.69,179 h10.04 r90; tPlace "Y" at 1043.62,175.06 h10.04 r90; tPlace "X" at 984.57,119.94 h10.04 r90